# Altium PCB L-D5019-01-04.PcbDoc
Units mm, origin at the board's own origin, x right, y up, seen from the top; angles counter-clockwise.
Board outline 73 x 33 mm, 2 copper layers (Top Layer, Bottom Layer), stack 1.57 mm thick; 53 components, 37 nets, 151 pads, 42 vias.
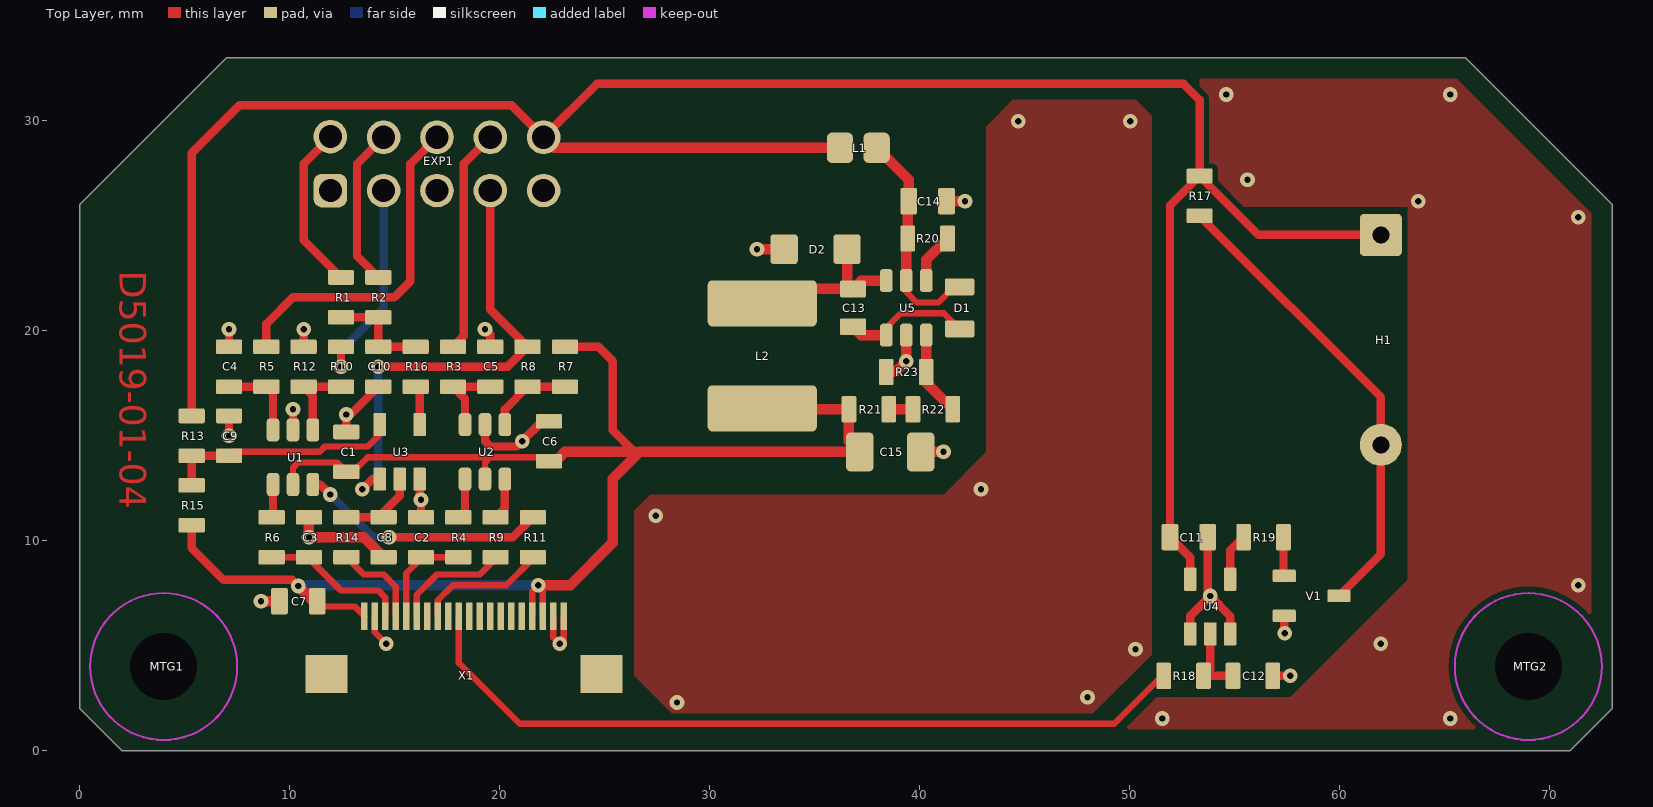
[diagram p0: Top Layer view]
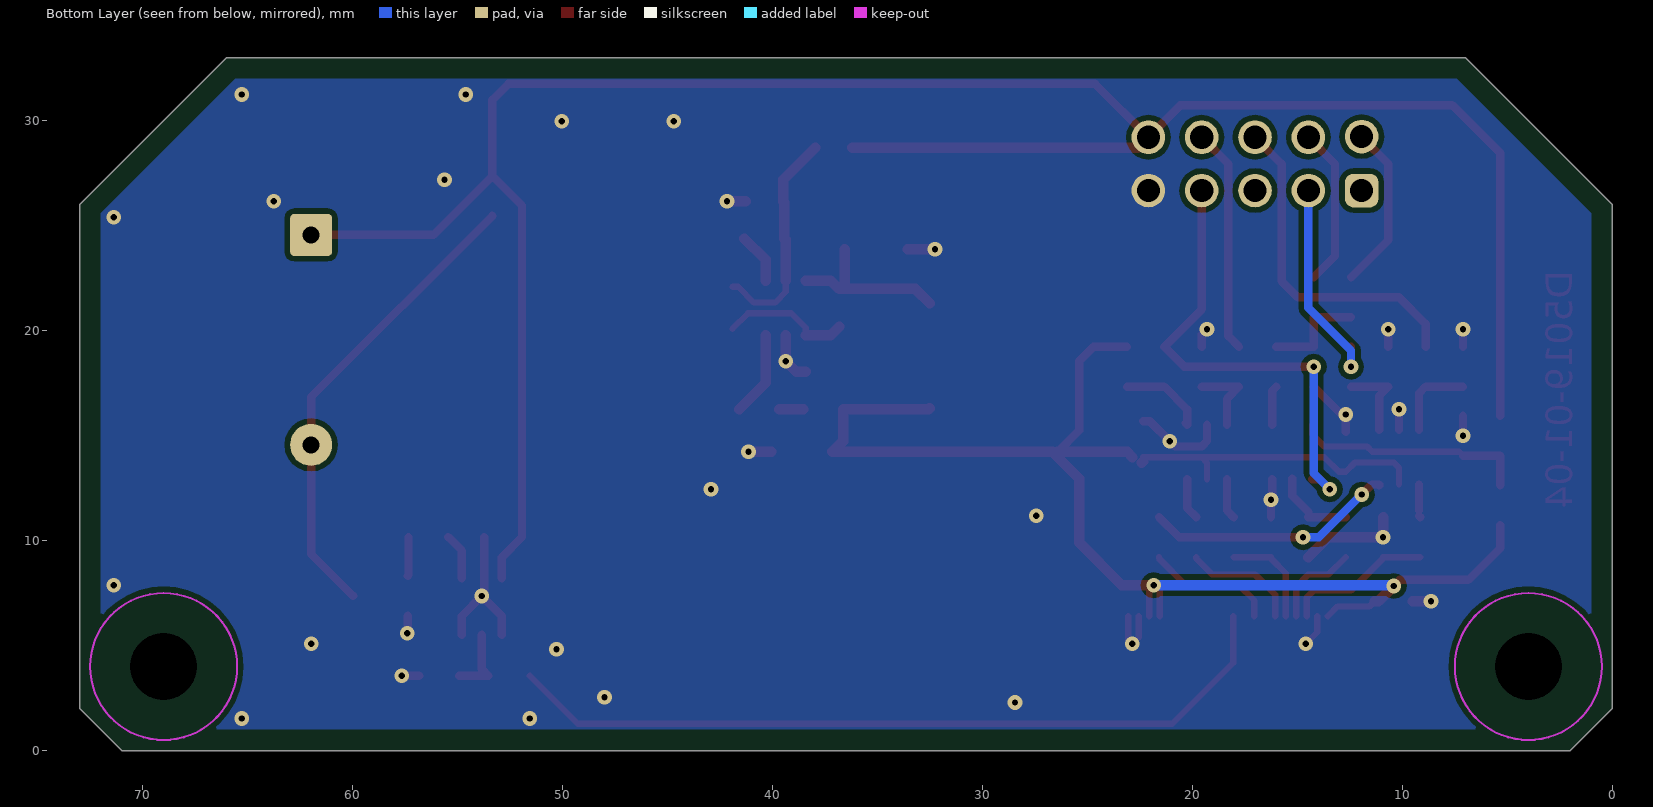
[diagram p1: Bottom Layer view, seen from below]
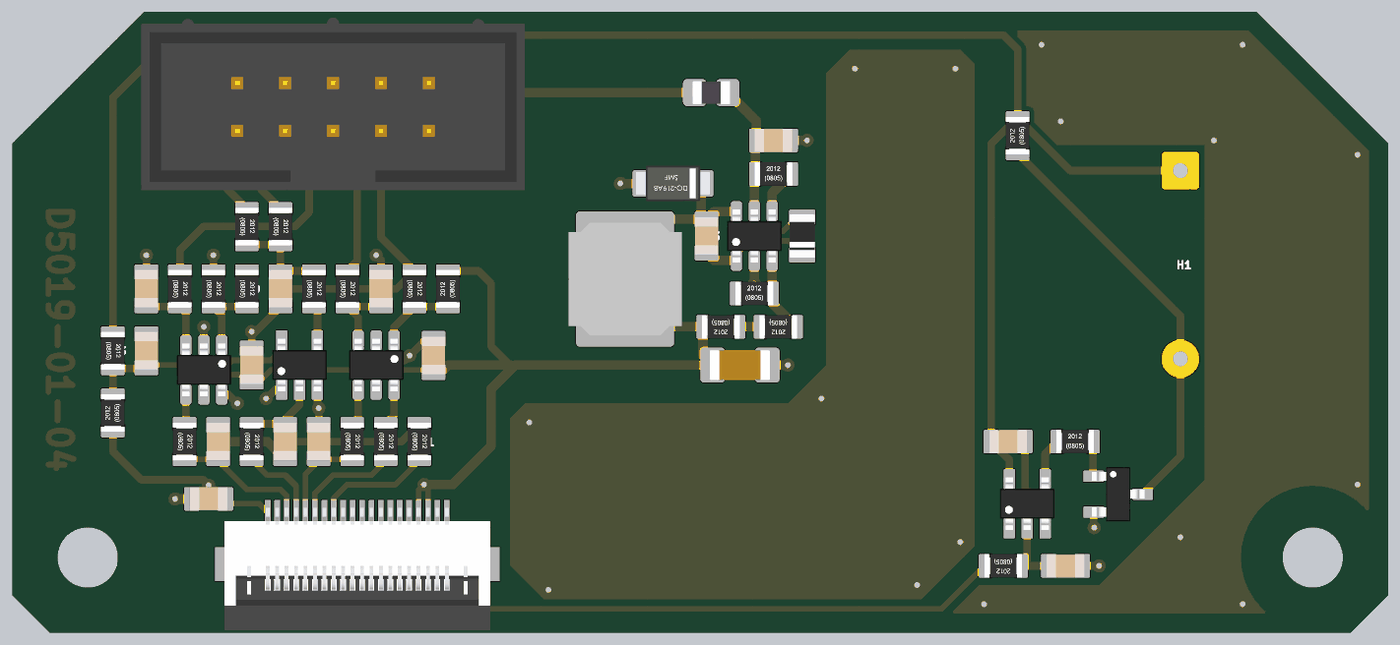
[diagram p2: 3D render of the assembled board from above, using the file's embedded part models]

## Layer stack, top to bottom
Top Solder: solder mask 0.01, Solder Resist, Dk 3.5
Top Layer: signal copper 0.035
Dielectric 1: dielectric 1.5, FR-4, Dk 4.8
Bottom Layer: signal copper 0.035
Bottom Solder: solder mask 0.01, Solder Resist, Dk 3.5

## Board outline
2,0 0,2 0,26 7,33 66,33 73,26 73,2 71,0

## Design rules (kind name [scope] priority, off if disabled: settings)
BoardOutlineClearance [All] p1: gap=1 ignorepadtopadclearanceinfootprint=FALSE except(1.5: THPad-OutlineEdge THPad-CavityEdge THPad-CutoutEdge THPad-SplitBarrior THPad-SplitContinuation)
Clearance 16 [InNet('12V')] p1: gap=0.254 ignorepadtopadclearanceinfootprint=FALSE except(0: Arc-Hole Track-Hole SMDPad-Hole THPad-Hole Via-Hole Fill-Hole Poly-Hole Region-Hole Text-Hole; 0.406: Arc-Poly Track-Poly SMDPad-Poly THPad-Poly Via-Poly Fill-Poly Poly-Poly)
Clearance [All] p2: gap=0.152 ignorepadtopadclearanceinfootprint=FALSE except(0: Arc-Hole Track-Hole SMDPad-Hole THPad-Hole Via-Hole Fill-Hole Poly-Hole Region-Hole Text-Hole; 0.254: Arc-Poly Track-Poly SMDPad-Poly THPad-Poly Via-Poly Fill-Poly Poly-Poly) // 1
HoleSize [All] p1: absolutevalues=TRUE maxlimit=5.08 minlimit=0.3 maxpercent=80.000 minpercent=20.000
MinimumSolderMaskSliver [All] p1: minsoldermaskwidth=0.051
PasteMaskExpansion [All] p1 off: expansion=0
PolygonConnect [All] p1: connectstyle=Direct reliefconductorwidth=0.406 reliefentries=4 polygonreliefangle="90 Angle" airgapwidth=0.254
RoutingVias [All] p1: holewidth=0.3 width=0.6 viastyle="Through Hole" minholewidth=0.3 minwidth=0.6 maxholewidth=4 maxwidth=5
SilkToBoardRegionClearance [All] p1 off:
SilkToSilkClearance [All] p1 off: silktosilkclearance=0.254
SilkToSolderMaskClearance [IsPad] p1 off: minsilkscreentomaskgap=0.254 clearancetoexposedcopper=TRUE
SolderMaskExpansion [All] p1: expansion=0.051 istentingtop=FALSE
Width [All] p1: maxlimit=2.54 minlimit=0.203 preferedwidth=0.406 minimp=50.000000 maximp=50.000000 favimp=50.000000
24 further rules are at their usual default settings.

## Components (designator, comment, footprint, x,y, rotation, side; value= is the part's Value field where it differs from the comment)
C1 "100n" CAPC2012X14L#1 12.7,14.224 r270 top
C2 "22p" CAPC2012X14L#1 16.256,10.16 r270 top
C3 "22p" CAPC2012X14L#1 10.922,10.16 r270 top
C4 "22p" CAPC2012X14L#1 7.112,18.28 r270 top
C5 "22p" CAPC2012X14L#1 19.558,18.28 r270 top
C6 "100n" CAPC2012X14L#1 22.352,14.732 r270 top
C7 "4µ7" CAPC2012X14L#2 10.414,7.112 r0 top
C8 "22p" CAPC2012X14L#1 14.478,10.16 r90 top
C9 "100n" CAPC2012X14L#1 7.112,14.986 r270 top
C10 "22p" CAPC2012X14L#1 14.224,18.28 r90 top
C11 "100n" CAPC2012X14L#2 52.832,10.16 r180 top
C12 "DNP" CAPC2012X14L#1 55.88,3.556 r180 top
C13 "100n" CAPC2012X14L#2 36.83,21.082 r90 top
C14 "4µ7" CAPC2012X14L#2 40.386,26.162 r180 top
C15 "22µF" CAPC3216X19N 38.608,14.224 r180 top
D1 "TS4148 RY" DIOC2012X10N 41.91,21.082 r90 top
D2 "ES07D" DIOM2818X11N 35.052,23.876 r180 top
EXP1 "2x5 2,54mm" PINH_2x5_2_54mm_shroud 17.018,27.94 r0 top
H1 "PKM17EPP-2002-B0" Speaker_17mm 61.976,19.558 r270 top
L1 "0R0" INDC2012X10L 37.084,28.702 r0 top
L2 "VLS6045AF-4R7M" POWERINDUCTOR_6X6 32.512,18.796 r270 top
MTG1 "MH_M3" HOLE_3_2MM 4,4 r0 top
MTG2 "MH_M3" HOLE_3_2MM 69,4 r0 top
R1 "DNP" RESC2012X06L 12.446,21.582 r270 top
R2 "0R0" RESC2012X06L 14.224,21.582 r270 top
R3 "10R" RESC2012X06L 17.78,18.28 r270 top
R4 "10R" RESC2012X06L 18.034,10.16 r270 top
R5 "10R" RESC2012X06L 8.89,18.28 r270 top
R6 "10R" RESC2012X06L 9.144,10.16 r270 top
R7 "10k" RESC2012X06L 23.114,18.28 r90 top
R8 "10R" RESC2012X06L 21.336,18.28 r270 top
R9 "10R" RESC2012X06L 19.812,10.16 r270 top
R10 "10R" RESC2012X06L 12.446,18.28 r270 top
R11 "10R" RESC2012X06L 21.59,10.16 r270 top
R12 "10k" RESC2012X06L 10.668,18.28 r270 top
R13 "DNP" RESC2012X06L 5.334,14.986 r270 top
R14 "10R" RESC2012X06L 12.7,10.16 r270 top
R15 "0R0" RESC2012X06L 5.334,11.684 r90 top
R16 "10R" RESC2012X06L 16.002,18.28 r270 top
R17 "1k" RESC2012X06L 53.34,26.416 r90 top
R18 "0r0" RESC2012X06L 52.578,3.556 r180 top
R19 "1k" RESC2012X06L 56.388,10.16 r0 top
R20 "10k" RESC2012X06L 40.386,24.384 r0 top
R21 "22k" RESC2012X06L 37.592,16.256 r180 top
R22 "10k" RESC2012X06L 40.64,16.256 r180 top
R23 "10k" RESC2012X06L 39.37,18.034 r0 top
U1 "74LVC2G17" SOT95P280X110-6N 10.16,13.97 r270 top
U2 "74LVC2G17" SOT95P280X110-6N 19.304,14.224 r270 top
U3 "74VHC1GT125" SOT95P280X110-5N 15.24,14.224 r90 top
U4 "74VHC1GT125" SOT95P280X110-5N 53.848,6.858 r90 top
U5 "RT8259GE" SOT95P280X110-6N 39.37,21.082 r90 top
V1 "BC817" SOT95P280X110-3N 58.674,7.366 r0 top
X1 "WE_687120149022" WE_687120149022 18.304,3.048 r0 top

## Footprints (in the part's own frame and the unit in brackets; to place one, negate y for a bottom-side part, rotate by r counter-clockwise, add the part's x,y. Pads: shape width x height; smd on the part's side, far side on the other; paste and mask are expansions set on the pad)
CAPC2012X14L#1 [mm] "Chip Capacitor, 2-Leads, Body 2,0x1,3mm, IPC High Density"
  rrect20% 0.7x1.25 smd: 1(-0.95,0) 2(0.95,0)
  body extent -1,-0.62 1,0.62, height 0.6
CAPC2012X14L#2 [mm] "Chip Capacitor, 2-Leads, Body 2,0x1,3mm, IPC High Density"
  rrect20% 0.8x1.25 smd: 1(-0.9,0) 2(0.9,0)
  body extent -1,-0.62 1,0.62, height 0.6
CAPC3216X19N [mm] "Chip Capacitor, 2-Leads, Body 3,2x1,6mm, IPC Medium Density"
  rrect30% 1.3x1.85 smd: 1(-1.45,0) 2(1.45,0)
  body extent -1.6,-0.8 1.6,0.8, height 1
DIOC2012X10N [mm] "Chip Diode, 2-Leads, Body 2,0x1,3mm, IPC Medium Density"
  rrect20% 0.8x1.4 smd: 1(-1,0) 2(1,0)
  body extent -1.15,-0.68 1.15,0.68, height 0.76
DIOM2818X11N [mm] "Molded Diode, 2-Leads, Body 2,80x1,80mm, IPC Medium Density"
  rrect20% 1.3x1.4 smd: 1(-1.5,0) 2(1.5,0)
  body extent -1.95,-0.95 1.95,0.95, height 1.25
HOLE_3_2MM [mm] "Mouting-Hole for screws M3 with keepout for washer"
  round 0 hole 3.2 unplated: 1(0,0)
  Keep-Out Layer circle w0.1: c0,0 r3.5
INDC2012X10L [mm] "Ferrite Bead, 2-Leads, Body 2,0x1,3mm, IPC High Density"
  rrect40% 1.25x1.45 smd: 1(-0.875,0) 2(0.875,0)
  body extent -1,-0.62 1,0.62, height 0.85
PINH_2x5_2_54mm_shroud [mm] "10 pins, straight, gold plating"
  rrect50% 1.6x1.6 hole 1.1: 1(-5.08,-1.27)
  round 1.6 hole 1.1: 2(-5.08,1.3) 3(-2.54,-1.27) 4(-2.54,1.27) 5(0,-1.27) 6(0,1.27) 7(2.54,-1.27) 8(2.54,1.27) 9(5.08,-1.27) 10(5.08,1.27)
  body extent -10.18,-4.42 10.18,4.75, height 9.13
POWERINDUCTOR_6X6 [mm] "SMD Inductor, 2-Leads, Body 6,0x6.0mm"
  rrect20% 2.2x5.2 smd: 1(-2.5,0) 2(2.5,0)
  body extent -3,-3 3,3, height 4
RESC2012X06L [mm] "Chip Resistor, 2-Leads, Body 2,0x1,3mm, IPC High Density"
  rrect20% 0.7x1.25 smd: 1(-0.95,0) 2(0.95,0)
  body extent -1,-0.62 1,0.62, height 0.45
SOT95P280X110-3N [mm] "SOT23, 3-Leads, Body 3,0x3,0mm (max), Pitch 0,95mm, IPC Medium Density"
  rrect20% 1.1x0.6 smd: 1(-1.3,0.95) 2(-1.3,-0.95) 3(1.3,0)
  body extent -1.4,-1.45 1.4,1.45, height 1.3
SOT95P280X110-5N [mm] "SOT23, 5-Leads, Body 3,0x3,0mm (max), Pitch 0,95mm, IPC Medium Density"
  rrect20% 1.1x0.6 smd: 1(-1.3,0.95) 2(-1.3,0) 3(-1.3,-0.95) 4(1.3,-0.95) 5(1.3,0.95)
  body extent -1.4,-1.45 1.4,1.45, height 1.45
SOT95P280X110-6N [mm] "SOT23, 6-Leads, Body 3,0x3,0mm (max), Pitch 0,95mm, IPC Medium Density"
  rrect50% 1.1x0.6 smd: 1(-1.3,0.95) 2(-1.3,0) 3(-1.3,-0.95) 4(1.3,-0.95) 5(1.3,0) 6(1.3,0.95)
  body extent -1.4,-1.45 1.4,1.45, height 1.45
Speaker_17mm [mm] "Speaker, 17mm dia"
  rrect20% 2x2 hole 0.8: 1(-5,0)
  round 2 hole 0.8: 2(5,0)
  body extent -8.5,-8.5 8.5,8.5, height 8.6
WE_687120149022 [mm] "0.50mm SMT ZIF Horizontal Hinge Type Bottom Contact, 20p"
  rect 0.3x1.3 smd: 1(-4.75,3.35) 2(-4.25,3.35) 3(-3.75,3.35) 4(-3.25,3.35) 5(-2.75,3.35) 6(-2.25,3.35) 7(-1.75,3.35) 8(-1.25,3.35) 9(-0.75,3.35) 10(-0.25,3.35) 11(0.25,3.35) 12(0.75,3.35) 13(1.25,3.35) 14(1.75,3.35) 15(2.25,3.35) 16(2.75,3.35) 17(3.25,3.35) 18(3.75,3.35) 19(4.25,3.35) 20(4.75,3.35)
  rect 2x1.8 smd: MH1(-6.55,0.6) MH2(6.55,0.6)
  body extent -7.05,-2.9 7.05,3.6, height 2.25

## Part data
C1 C2 C3 C4 C5 C6 C7 C8 C9 C10 C11 C12 C13 C14: library part CAPC_0805, "0805 Chip Capacitor", PackageDescription=0805, Part Number=CAPC_0805
  C1 C2 C3 C4 C5 C6 C8 C9 C10 C11 C12 C13: Bauteilart=Capacitor, Editor=rriedel, Kategorie=generic, Status=tested, Unterart=unpolarized
  C7 C14: Bauteilart=Kondensator, Ersteller=rriedel, Freigabe=unchecked, ID=894, Kategorie=generisch, Mounting=SMT, Polar=u, timestamp="17.08.2016 13:43:45", Unterart=ungepolt
C15: library part CAPC_1206, "1206 Chip Capacitor", Bauteilart=Capacitor, Editor=rriedel, Kategorie=generic, PackageDescription=1206, Part Number=CAPC_1206, Status=tested, Unterart=unpolarized
D1: library part "TSC_TS4148 RY", "Small Signal Diode IF 0.3A, VR 75V, 0805", Manufacturer=TSC, Bauteilart=Diode, Date=09.10.2013, Editor=rriedel, Kategorie=Part, PackageDescription=0805, Part Number="TSC_TS4148 RY", Part_Number_1="TS4148 RY", Status=tested, Unterart="Small Signal"
D2: "Ultrafast Rectifier Surface Mount,  IF 0.5A, VR 100V, DO-219AB, AEC-Q101", Manufacturer=Vishay, Bauteilart=Diode, Date=09.10.2013, Editor=rriedel, Kategorie=Part, PackageDescription=DO-219AB, Part Number=ES07D, Part_Number_1=ES07D, Status=tested, Unterart=Rectifier
EXP1: library part PINH_2x5_2_54, "Pin-Header 2,54 mm 2x5pins, shrouded", Bauteilart=Connector, Date=31.03.2019, Editor=rriedel, Kategorie=generic, Part Number=PINH_2x5_2_54, Status=tested, Unterart=Pin-Header
H1: "Speaker, Piezo, THT, dia 17mm,  height 8.6 mm", Manufacturer=Murata, Bauteilart=Electromechanical, Date=23.05.2020, Distributor_1=Digi-Key, Distributor_1_Part_Number=490-4688-ND, Editor=rriedel, Kategorie=Part, PackageDescription="THT, 12mm dia", Part Number=PKM17EPP-2002-B0, Part_Number_1=PKM17EPP-2002-B0, Status=new, Unterart=Speaker
L1: library part INDC_0805, "0805 Chip Inductor", Bauteilart=Inductor, Date=31.03.2019, Editor=rriedel, Kategorie=generic, PackageDescription=0805, Part Number=INDC_0805, Status=tested, Unterart=generic
L2: "4,7µH, shielded, 4,7A, 26mR", Manufacturer=TDK, Bauteilart=Inductor, Date=31.03.2019, Distributor_1=Digi-Key, Distributor_1_Part_Number=445-180835-1-ND, Editor=rriedel, Kategorie=Part, PackageDescription="6x6 mm", Part Number=VLS6045AF-4R7M, Part_Number_1=VLS6045AF-4R7M, Status=tested, Unterart=Power
MTG1 MTG2: "Mounting-Hole for M3 screws", Bauteilart=Mechanic, Date=13.05.2018, Editor=rriedel, Kategorie=No_Bom, Part Number=MH_M3, Status=tested, Unterart=Holes
R1 R2 R3 R4 R5 R6 R7 R8 R9 R10 R11 R12 R13 R14 R15 R16 R17 R18 R19 R20 R21 R22 R23: library part RESC_0805, "0805 Chip Resistor", Bauteilart=Resistor, Editor=rriedel, Kategorie=generic, PackageDescription=0805, Part Number=RESC_0805, Status=tested, Unterart=generic
U1 U2: "Dual Schmitt-Trigger Buffer with 5.5V tolerant inputs", Manufacturer=TI, Bauteilart=IC, ComponentLink1Description=datasheet, ComponentLink1URL="D:\HSC_Bibliothek\Datenblaetter\pcb\Integrierte Schaltkreise\TI\sn74lvc2g14-q1.pdf", ComponentLink2Description=WebLink, ComponentLink2URL=http://de.farnell.com/texas-instruments/sn74lvc2g14idckrq1/schmitt-trigger-invert-smd/dp/1236370RL, Date=08.05.2020, Distributor_1=Digi-Key, Distributor_1_Part_Number=296-SN74LVC2G17DBVRCT-ND‎, Editor=rriedel, Kategorie=Part, PackageDescription=SOT23-6, Part Number=74LVC2G17, Part_Number_1=74LVC2G17DBVR, Status=tested, Unterart=Logic
U3 U4: "1x Buffer with OE; 3-state,Level Shifter 3,3V to 5V and 5V to 3.3V", Manufacturer="ON Semiconductor", Bauteilart=IC, Date=21.01.2011, Distributor_1=Farnell, Distributor_1_Part_Number=1703291, Editor=rriedel, Kategorie=Part, PackageDescription=SOT23-5, Part Number=74VHC1GT125, Part_Number_1=M74VHC1G125DT1G, Status=tested, Unterart=Logic
U5: "Step-Down DC/DC Regulator, 24V, 1.2A, 1,4MHz", Manufacturer=Richtek, Bauteilart=IC, Date=31.03.2019, Distributor_1=Digi-Key, Distributor_1_Part_Number=1028-1497-1-ND, Editor=rriedel, Kategorie=Part, PackageDescription=SOT23-6, Part Number=RT8259GE, Part_Number_1=RT8259GE, Status=tested, Unterart=Switching-Regulators
V1: "NPN Transistor SOT23, 1=B, 2=C, 3=E", Bauteilart=Transistor, Date=23.05.2020, Editor=rriedel, Kategorie=Part, PackageDescription=SOT23, Part Number=BC817, Status=tested, Unterart=NPN
X1: "20pin WR-FPC 0.50 mm SMT ZIF Horizontal - Bottom Contact", Manufacturer=Wuerth, Bauteilart=Connector, Date=25.05.2020, Distributor_1=Digi-Key, Distributor_1_Part_Number=732-6002-1-ND, Editor=rriedel, Kategorie=Part, PackageDescription="FPC 0.5mm", Part Number=WE_687120149022, Part_Number_1=6.8712014902e+011, Status=tested, Unterart=FPC

## Via types
v1: diameter 0.7, hole 0.3, Top Layer to Bottom Layer, tented both sides, 42 vias

## Nets (pads, with @x,y where several pads share a name; then routed paths per layer and width w, separated by ;. In a path a pad name is that pad's centre, name@x,y a point inside that pad or via, vN(x,y) a via of type N, cw(c..) or ccw(c..) an arc to the next point about the centre after c; other vN are vias at no path point)
3V3: C1.2 C6.2 C7.2 C15.2 L2.2 R7.2 R15.1 R21.2 U1.5 U2.5 X1.1 X1.17 X1.18 | length 77.4
  Top Layer w0.3: U1.5 10.16,13.462 10.414,13.716 12.258,13.716 C1.2 13.02,13.274 13.716,13.97 19.558,13.97 ; C7.2 11.568,6.858 13.094,6.858 X1.1 ; U2.5 19.304,13.716 19.558,13.97 ; X1.17 21.554,7.584 v1(21.844,7.874) 22.054,7.664 X1.18 ; C6.2@22.352,13.97 19.558,13.97
  Top Layer w0.4: R15.1 5.334,9.652 6.858,8.128 10.123,8.128 v1(10.414,7.837) ; R7.2 24.712,19.23 25.4,18.542 25.4,15.24 26.416,14.224 26.67,14.224
  Top Layer w0.5: v1(10.414,7.837) 11.139,7.112 C7.2 ; v1(21.844,7.874) 23.368,7.874 25.4,9.906 25.4,12.954 26.67,14.224 C15.2 36.642,14.74 R21.2 32.552,16.256 L2.2 ; C6.2 C6.2@22.418,13.716 ; C6.2@22.86,13.97 23.114,14.224 26.416,14.224
  Bottom Layer w0.5: v1(10.414,7.837) 10.451,7.874 v1(21.844,7.874)
5V: C11.2 EXP1.10 H1.1 L1.1 R13.1 R17.2 U4.5 | length 111.3
  Top Layer w0.4: R13.1 5.334,28.448 7.62,30.734 20.574,30.734 EXP1.10 24.638,31.75 52.578,31.75 53.34,30.988 R17.2 ; U4.5@52.898,8.208 52.898,9.194 C11.2 51.932,25.958 R17.2 ; H1.1 56.148,24.558 R17.2
  Top Layer w0.5: EXP1.10 22.606,28.702 L1.1
Audio: R18.2 X1.10 | length 37.9
  Top Layer w0.3: X1.10 18.054,4.171 20.955,1.27 49.276,1.27 R18.2@51.565,3.559
CS_TFT_3V3: R9.2 X1.6 | length 5.6
  Top Layer w0.3: X1.6 16.054,7.418 17.018,8.382 19.05,8.382 19.812,9.144 R9.2
GND: C1.1 C2.1 C3.1 C4.1 C5.1 C6.1 C7.1 C8.1 C9.1 C10.1 C11.1 C12.1 C14.1 C15.1 D2.2 EXP1.9 R12.1 R23.1 U1.2 U2.2 U3.3 U4.1 U4.3 U5.2 V1.2 X1.2 X1.19 X1.20 | length 38.6
  Top Layer w0.3: X1.2 14.054,5.631 v1(14.605,5.08) ; X1.19 22.554,5.386 v1(22.86,5.08) 23.054,5.274 X1.20
  Top Layer w0.4: v1(7.112,14.986) C9.1 ; C4.1 v1(7.112,20.066) ; U1.2 v1(10.16,16.256) ; R12.1 v1(10.668,20.066) ; C1.1 v1(12.7,16.002) 12.896,16.002 C10.1 ; U3.3 16.19,12.004 v1(16.256,11.938) C2.1 ; U2.2 19.304,14.732 19.558,14.478 20.828,14.478 v1(21.082,14.732) 22.032,15.682 C6.1 ; v1(19.304,20.066) 19.558,19.812 C5.1 ; U4.1@52.898,5.508 52.898,6.408 v1(53.848,7.358) ; C11.1 53.732,7.474 v1(53.848,7.358) ; U4.3@54.798,5.508 54.798,6.408 v1(53.848,7.358) ; C12.1 v1(57.658,3.556) ; V1.2 57.374,5.618 v1(57.404,5.588)
  Top Layer w0.5: v1(8.636,7.112) C7.1 ; C3.1 v1(10.922,10.16) 13.528,10.16 C8.1 ; v1(32.258,23.876) D2.2 ; R23.1 38.862,18.034 v1(39.37,18.542) U5.2 ; C15.1 v1(41.148,14.224) ; C14.1 v1(42.164,26.162)
  other v1: 51.562,1.524 65.278,1.524 28.448,2.286 48.006,2.54 50.292,4.826 61.976,5.08 71.374,7.874 27.432,11.176 42.926,12.446 71.374,25.4 63.754,26.162 55.626,27.178 44.704,29.972 50.038,29.972 54.61,31.242 65.278,31.242
MISO_3V3: R14.2 X1.4 | length 4.3
  Top Layer w0.3: R14.2 13.528,8.382 14.478,8.382 15.054,7.806 X1.4
MOSI_3V3: C2.2 R4.2 X1.5 | length 4.9
  Top Layer w0.3: X1.5 15.554,8.442 16.256,9.144 C2.2 R4.2
NetC4_2: C4.2 R5.2 U1.3 | length 4
  Top Layer w0.4: C4.2 R5.2 9.21,17.01 U1.3
NetC5_2: C5.2 R3.2 U2.3 | length 3.8
  Top Layer w0.4: U2.3 18.354,16.756 R3.2 C5.2
NetC8_2: C8.2 R14.1 U3.2 | length 3.7
  Top Layer w0.4: R14.1 C8.2 ; C8.2@14.478,11.364 15.24,12.126 U3.2 U3.2@15.24,12.954
NetC9_2: C9.2 R13.2 R15.2 U3.5 | length 11.3
  Top Layer w0.3: C9.2 7.3,14.224 11.43,14.224 11.684,14.478 13.716,14.478 14.29,15.052 U3.5
  Top Layer w0.4: R15.2 R13.2 C9.2
NetC12_2: C12.2 R18.1 U4.2 | length 3.5
  Top Layer w0.4: U4.2@53.848,5.508 53.848,3.876 R18.1 C12.2
NetC13_1: C13.1 D1.1 U5.1 | length 6.2
  Top Layer w0.3: U5.1 38.42,20.132 39.116,20.828 41.164,20.828 D1.1
  Top Layer w0.5: C13.1 37.23,19.782 U5.1
NetC13_2: C13.2 D2.1 L2.1 U5.6 | length 8.4
  Top Layer w0.5: L2.1 33.198,21.982 C13.2 ; D2.1 36.552,22.26 C13.2 ; U5.6 37.23,22.382 C13.2
NetC14_2: C14.2 D1.2 L1.2 R20.1 U5.5 | length 10.6
  Top Layer w0.3: U5.5 39.37,21.844 39.878,21.336 40.894,21.336 41.64,22.082 D1.2
  Top Layer w0.5: L1.2 39.486,27.175 C14.2 39.436,26.112 R20.1 39.37,24.318 U5.5
NetEXP1_2: EXP1.2 R1.1 | length 7.9
  Top Layer w0.4: EXP1.2@11.938,29.21 10.668,27.94 10.668,24.31 R1.1
NetEXP1_4: EXP1.4 R2.1 | length 7.6
  Top Layer w0.4: R2.1 13.208,23.548 13.208,27.94 EXP1.4
NetH1_2: H1.2 R17.1 V1.3 | length 22.5
  Top Layer w0.4: R17.1 61.976,16.83 H1.2 61.976,9.368 V1.3
NetR4_1: R4.1 U2.4 | length 1.9
  Top Layer w0.4: R4.1 18.354,11.43 U2.4
NetR6_1: R6.1 U1.4 | length 1.3
  Top Layer w0.4: R6.1 R6.1@9.21,11.176 ; R6.1@9.21,11.43 U1.4
NetR7_1: R7.1 R8.2 U2.1 | length 4.1
  Top Layer w0.4: U2.1@20.32,15.59 U2.1 20.254,16.248 R8.2 R7.1
NetR9_1: R9.1 U2.6 | length 2
  Top Layer w0.4: R9.1 20.254,11.552 U2.6
NetR10_2: R10.2 R12.2 U1.1 | length 4
  Top Layer w0.4: U1.1 11.11,16.888 R12.2 R10.2
NetR11_1: R11.1 U1.6 | length 12
  Top Layer w0.4: U1.6@11.11,12.62 U1.6 11.46,12.67 v1(11.938,12.192) ; v1(14.732,10.16) 20.64,10.16 R11.1
  Bottom Layer w0.4: v1(11.938,12.192) 13.97,10.16 v1(14.732,10.16)
NetR16_2: R16.2 U3.4 | length 1.9
  Top Layer w0.4: R16.2 16.19,17.142 U3.4
NetR19_1: R19.1 U4.4 | length 2.2
  Top Layer w0.4: U4.4@54.798,8.208 54.798,9.52 R19.1
NetR19_2: R19.2 V1.1 | length 1.9
  Top Layer w0.4: R19.2 57.338,8.352 V1.1
NetR20_2: R20.2 U5.4 | length 2.4
  Top Layer w0.5: U5.4 40.32,23.368 R20.2
NetR21_1: R21.1 R22.2 | length 1.1
  Top Layer w0.5: R21.1 R22.2
NetR22_1: R22.1 R23.2 U5.3 | length 4.1
  Top Layer w0.5: U5.3 R23.2 40.32,17.526 R22.1
PD_TFT_3V3: R11.2 X1.8 | length 6.2
  Top Layer w0.3: X1.8 17.054,7.148 17.78,7.874 20.32,7.874 21.59,9.144 R11.2
SCK_3V3: C3.2 R6.2 X1.3 | length 7.1
  Top Layer w0.3: R6.2 C3.2 10.922,9.144 12.446,7.62 14.224,7.62 14.554,7.29 X1.3
X_CS_TFT: EXP1.7 R8.1 U3.1 | length 22.9
  Top Layer w0.4: v1(13.462,12.446) 13.94,12.924 U3.1 ; v1(14.224,18.28) 20.386,18.28 R8.1 19.558,21.008 EXP1.7
  Bottom Layer w0.4: v1(13.462,12.446) 14.224,13.208 v1(14.224,18.28)
X_MISO: C10.2 R1.2 R2.2 R16.1 | length 5
  Top Layer w0.4: R1.2 R2.2 C10.2 R16.1
X_MOSI: EXP1.8 R3.1 | length 10.7
  Top Layer w0.4: R3.1 18.288,19.738 18.288,27.94 EXP1.8
X_PD_TFT: EXP1.3 R10.1 | length 10.2
  Top Layer w0.4: v1(12.446,18.28) R10.1
  Bottom Layer w0.4: v1(12.446,18.28) 12.446,19.05 14.478,21.082 EXP1.3
X_SCK: EXP1.6 R5.1 | length 16.2
  Top Layer w0.4: R5.1 8.89,20.32 10.16,21.59 14.986,21.59 15.748,22.352 15.748,27.94 EXP1.6
pads on no net: EXP1.1 EXP1.5 MTG1.1 MTG2.1 X1.7 X1.9 X1.11 X1.12 X1.13 X1.14 X1.15 X1.16 X1.MH1 X1.MH2

## Polygon pours and split planes (outlines as drawn)
GND on Top Layer "GND_L01_P001" (solid, pour order 1): 28.194,1.778 26.416,3.556 26.416,11.43 27.178,12.192 41.148,12.192 43.18,14.224 43.18,29.718 44.45,30.988 50.292,30.988 51.054,30.226 51.054,4.572 48.26,1.778
GND on Top Layer "GND_L01_P002" (solid, pour order 2): 51.308,2.54 49.784,1.016 73.914,1.016 73.914,26.416 66.548,33.782 64.77,32.004 56.134,32.004 53.34,32.004 53.34,25.908 63.246,25.908 63.246,8.128 57.658,2.54
GND on Bottom Layer "GND_L02_P000" (solid, remove dead copper, pour order 0): -1,38.27 -1,0.254 72.914,0.254 73.168,0.508 73.168,38.016

## Other copper
Top Layer:
  pour cut-out: 65.5,4 ccw(c69,4) 69,0.5 ccw(c69,4) 72.5,4 ccw(c69,4) 69,7.5 ccw(c69,4)
  text "D5019-01-04" at 1.905,22.86 h1.27 r270

## Silkscreen, mask and mechanical layers (free items; w line width, h text height)
M1_Dimension:
  the board outline again, w0.254

## Dimensions
73,26 to 0,26 on M2_Measures
73,0 to 7,33 on M2_Measures
4,4 to 69,4 on M2_Measures